# Altium PCB EM_Power_V2.PcbDoc (part 2 of 3)
Units mm, origin at the board's own origin, x right, y up, seen from the top; angles counter-clockwise.
Board outline 82 x 56 mm, 2 copper layers (Top Layer, Bottom Layer); 82 components, 61 nets, 273 pads, 201 vias.
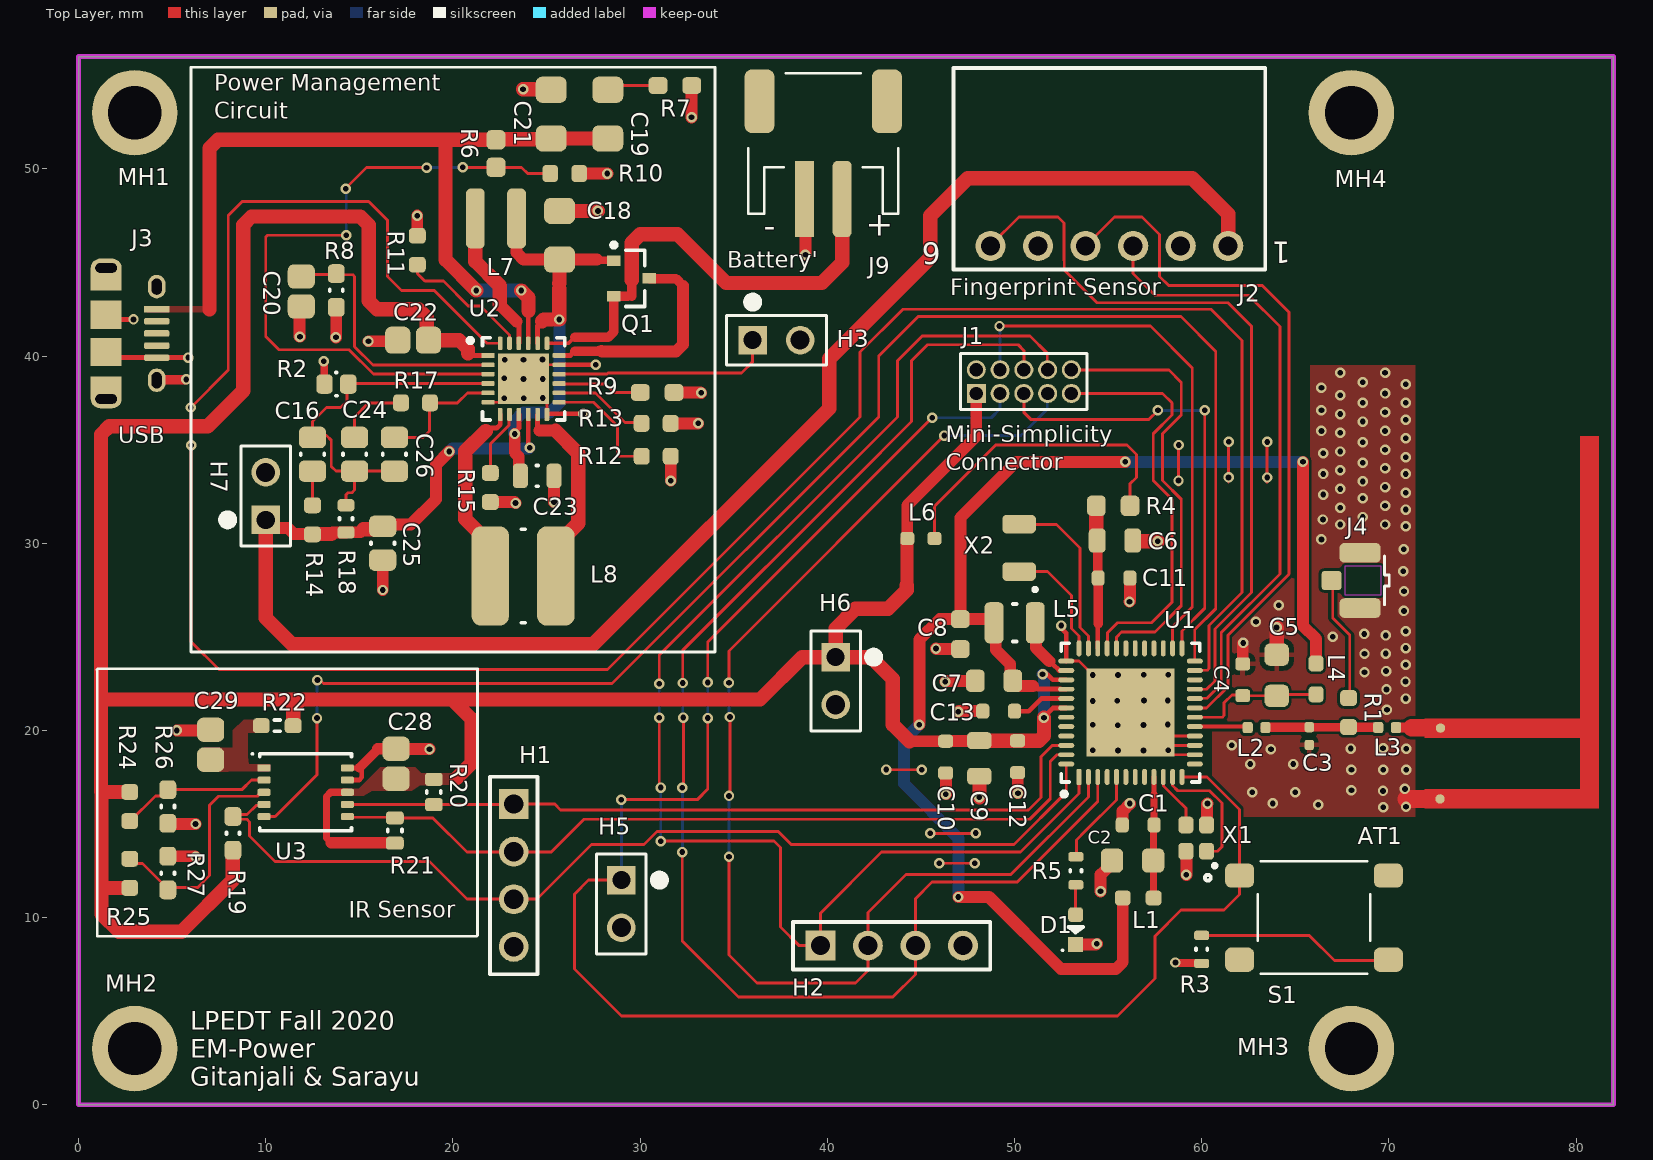
[diagram p0: Top Layer view]

## Part data (continued)
D1: library part L1CU-RED1000000000, "LED LUXEON CZ RED SMD", Case Code (Imperial)=0603, Case Code (Metric)=1608, Color=Green, Forward Current=30mA, Forward Voltage=3.2V, Manufacturer="Wurth Electronics", Manufacturer Part Number=150060GS75000, Max Operating Temperature=85°C, Min Operating Temperature=-40°C, Package Quantity=4000, Supplier Part Number 1=1416-2040-1-ND, Test Current=20mA, Case/Package=0603, Category=LEDs, ComponentLink1Description=https://datasheet.ciiva.com/29562/150060gs75000-29562868.pdf?src-supplier=Digi-Key, ComponentLink1URL=https://datasheet.ciiva.com/29562/150060gs75000-29562868.pdf?src-supplier=Digi-Key, ComponentLink2Description=https://datasheet.ciiva.com/29279/759427-da-01-en-chipled-0603-w-kl-gruen-150060gs75000-29279201.pdf?src-supplier=Conrad, ComponentLink2URL=https://datasheet.ciiva.com/29279/759427-da-01-en-chipled-0603-w-kl-gruen-150060gs75000-29279201.pdf?src-supplier=Conrad, ComponentLink3Description=https://datasheet.ciiva.com/29562/150060gs75000-29562870.pdf?src-supplier=Digi-Key, ComponentLink3URL=https://datasheet.ciiva.com/29562/150060gs75000-29562870.pdf?src-supplier=Digi-Key, ComponentLink4Description=https://datasheet.ciiva.com/29562/150060gs75000-29562869.pdf?src-supplier=Digi-Key, ComponentLink4URL=https://datasheet.ciiva.com/29562/150060gs75000-29562869.pdf?src-supplier=Digi-Key, Dominant Wavelength=520nm, Height=0.7mm, Lead Free="Lead Free", Length=1.6mm, Lens Style=Clear,Rectangular, Luminous Intensity=430mcd, Mount="Surface Mount", Packaging="Tape and Reel", Pricing 1="1=0.14000, 50=0.13300, 100=0.11400, 500=0.09900 (USD)", REACH SVHC=Unknown, RoHS=Yes, Stock 1=94535, Supplier 1=Digi-Key, Viewing Angle=140°, Wavelength=520nm, Width=0.8mm
H1 H2: library part PRPC004SAAN-RC, "CONN HEADER VERT 4POS 2.54MM", Color=Black, Manufacturer=Sullins, Standard Package=1, Supplier Part Number 1=S1011EC-04-ND, Category="Connectors, Interconnects", ComponentLink1Description=https://media.digikey.com/PDF/Data%20Sheets/Sullins%20PDFs/xRxCzzzSxxN-RC_ST_11635-B.pdf?src-supplier=Digi-Key, ComponentLink1URL=https://media.digikey.com/PDF/Data%20Sheets/Sullins%20PDFs/xRxCzzzSxxN-RC_ST_11635-B.pdf?src-supplier=Digi-Key, Connector Type="Header, Unshrouded, Breakaway", Contact Finish=Gold, Contact Finish Thickness=Flash, Contact Mating Length="0.230\" (5.84mm)", Contact Type="Male Pin", Family="Rectangular Connectors - Headers, Male Pins", Fastening Type=-, Features=-, Manufacturer Part Number=PRPC004SAAN-RC, Mounting Type="Through Hole", Number of Positions=4, Number of Positions Loaded=All, Number of Rows=1, Online Catalog="0.100\" (2.54mm) Pitch Connector Headers", Other Names="S9510E-04  S9510E-04-ND", Packaging=Bulk, Pitch="0.100\" (2.54mm)", Pricing 1="1=0.15, 10=0.146, 25=0.1084, 50=0.0928, 100=0.0898, 250=0.0774, 500=0.0743 (USD)", Row Spacing=-, Series=-, Stock 1=6306, Supplier 1=Digi-Key, Termination=Solder
H3 H5 H6 H7: library part 77311-118-02LF, "Test point", Manufacturer="Amphenol ICC / FCI", Supplier Part Number 1=609-4434-ND, Category="Headers and Wire Housings", Manufacturer Part Number=77311-118-02LF, Pricing 1="1=0.19000, 10=0.18200, 100=0.12580, 500=0.10648, 1000=0.08712, 5000=0.07744, 10000=0.07018 (USD)", RoHS=No, Stock 1=29534, Supplier 1=Digi-Key
J1: "10-pin Mini Simplicity Connector, 1.27 mm, 10 Contacts, Header, FTSH Series, Through Hole, 2 Rows - Board-To-Board Connector, 1.27 mm, 10 Contacts, Header, FTSH Series, Through Hole, 2 Rows", Color=Black, Manufacturer=Samtec, Max Operating Temperature=125°C, Min Operating Temperature=-55°C, Package Quantity=1, Supplier Part Number 1=SAM8798-ND, Category="Headers and Wire Housings", ComponentLink1Description=https://datasheet.ciiva.com/739/ftsh-1xx-xx-xxx-d-xx-mkt-739003.pdf?src-supplier=Digi-Key, ComponentLink1URL=https://datasheet.ciiva.com/739/ftsh-1xx-xx-xxx-d-xx-mkt-739003.pdf?src-supplier=Digi-Key, Connector Type="Male Pin", Contact Material=Bronze, Contact Mating Length=0.12inch, Contact Plating=Gold, Depth=3.43mm, Gender=Male, Housing Color=Black, Housing Material=Polymer, Length=6.35mm, Manufacturer Part Number=FTSH-105-01-L-D-K, Mount="Through Hole", Number of Contacts=10, Number of Positions=10, Number of Rows=2, Orientation=Straight, Packaging=Rail/Tube, Pitch=1.27mm, Pricing 1="1=2.73000, 10=2.61600, 100=2.18000, 500=1.85300, 1000=1.58050, 5000=1.41700 (USD)", Radiation Hardening=No, RoHS=Yes, Row Spacing=0.05inch, Stock 1=2511, Supplier 1=Digi-Key, Termination=Solder
J2: "Conn Socket Strip SKT 6 POS 2.54mm Solder RA SMD Automotive Tube", Color=Black, Contact Resistance=10mR, Current Rating=6.9A, Manufacturer=Samtec, Manufacturer Part Number=SSM-106-L-SH, Max Operating Temperature=125°C, Max Voltage Rating (AC)=450V, Min Operating Temperature=-55°C, Supplier Part Number 1=S5442-ND, Category="Headers and Wire Housings", ComponentLink1Description=https://datasheet.ciiva.com/25617/0900766b81159465-25617416.pdf?src-supplier=RSComponents, ComponentLink1URL=https://datasheet.ciiva.com/25617/0900766b81159465-25617416.pdf?src-supplier=RSComponents, ComponentLink2Description=https://datasheet.ciiva.com/746/ssm-1xx-xxx-xx-xx-xx-x-xx-xx-mkt-746688.pdf?src-supplier=Digi-Key, ComponentLink2URL=https://datasheet.ciiva.com/746/ssm-1xx-xxx-xx-xx-xx-x-xx-xx-mkt-746688.pdf?src-supplier=Digi-Key, Connector Type=Receptacle,Socket, Contact Material=Bronze, Contact Plating=Gold, Depth=8.13mm, Gender=Receptacle, Housing Color=Black, Housing Material=Polymer, Lead Free="Lead Free", Length=15.24mm, Max Current Rating=6.9A, Number of Contacts=6, Number of Positions=6, Number of Rows=1, Orientation=Horizontal, Packaging=Rail/Tube, Pitch=2.54mm, Pricing 1="1=2.05000, 10=1.79000, 25=1.67000, 100=1.63000, 250=1.50000, 500=1.26000 (USD)", Radiation Hardening=No, REACH SVHC="No SVHC", RoHS=Yes, Stock 1=228, Supplier 1=Digi-Key, Termination=Solder, Voltage Rating=450V
J3: "10118194-0001LF micro-USB paste-in-pad", Color=Black, Current Rating="1.8 A", Flammability Rating="UL 94 V-0", Insulation Resistance="1000 MOhms", Manufacturer=FCI, Manufacturer Part Number=10118194-0001LF, Operating Temperature Range="- 55 C to + 85 C", Supplier Part Number 1=609-4618-1-ND, .Creator="Kailey Shara", .PCBchecked=KS, .SCHchecked=KS, Brand=FCI, Category="Connectors, Interconnects", ComponentLink1Description=http://portal.fciconnect.com/Comergent//fci/drawing/10118194.pdf, ComponentLink1URL=http://portal.fciconnect.com/Comergent//fci/drawing/10118194.pdf, Connector Type="USB - micro B", Contact Material="Copper Alloy", Contact Plating=Gold, Features="Shielded, Solder Retention", Gender=Receptacle, Ingress Protection=-, Minimum Order Quantity=1, Mounting Angle=Right, Mounting Type="Surface Mount, Right Angle, Horizontal", Number of Contacts=5, Packaging="Cut Tape (CT)", Pricing 1="1=0.46, 10=0.433, 25=0.3712, 50=0.3156, 100=0.3032, 250=0.27224, 500=0.25988 (USD)", Product="Micro USB Type B Connectors", Reeling=True, RoHS="RoHS Compliant", Specifications="USB 2.0", Standard="USB 2.0", Standard Pack Qty=1200, Stock 1=27978, Supplier 1=Digi-Key, Termination Style=SMD
J4: library part "U.FL connector U.FL-R-SMT(10)", "CONN UMC JACK STR 50 OHM SMD", Dielectric Material="Liquid Crystal Polymer (LCP)", Frequency - Max=6GHz, Housing Color=Silver, Manufacturer="Hirose Electric Co Ltd", Maximum Frequency="6 GHz", Operating Temperature="-40°C ~ 90°C", Operating Temperature Range="- 40 C to + 90 C", Supplier Part Number 1=H9161CT-ND, Voltage Rating=-, Body Finish=Silver, Body Material="Phosphor Bronze", Brand="Hirose Connector", Cable Group=-, Category="Connectors, Interconnects", Center Contact Material="Phosphor Bronze", Center Contact Plating=Gold, ComponentLink1Description=http://media.digikey.com/pdf/Data%20Sheets/Hirose%20PDFs/UFL%20Series.pdf, ComponentLink1URL=http://media.digikey.com/pdf/Data%20Sheets/Hirose%20PDFs/UFL%20Series.pdf, ComponentLink2Description=http://www.hirose.co.jp/cataloge_hp/ed_UFL_20141014.pdf, ComponentLink2URL=http://www.hirose.co.jp/cataloge_hp/ed_UFL_20141014.pdf, Connector Style=U.FL, Connector Type="Jack, Male Pin", Contact Material=Brass, Contact Plating=Gold, Contact Termination=Solder, Fastening Type=Snap-On, Features=-, Gender=Plug, Impedance="50 Ohm", Ingress Protection=-, Manufacturer Part Number=U.FL-R-SMT(10), Minimum Order Quantity=1, Mounting Type="Surface Mount", Orientation=Vertical, Packaging="Cut Tape (CT)", Pricing 1="1=1.33, 10=1.173, 25=1.104, 50=1.058, 100=1.012, 250=0.92004, 500=0.82804, 1000=0.7216 (USD)", Pricing 2="1=1.75, 10=1.40, 100=1.34, 250=1.22, 500=1.12, 1000=0.974, 2500=0.882, 5000=0.852, 10000=0.792 (AUD)", Product=Connectors, Product Category="Coaxial Connectors", Reeling=True, RoHS="RoHS Compliant", RoHS - Mouser=Y, Series=U.FL, Shield Termination=Solder, Standard Pack Qty=2500, Stock 1=132773, Stock 2=89108, Supplier 1=Digi-Key, Supplier 2=Mouser, Supplier Part Number 2=798-U.FL-R-SMT10, Termination Style=Solder, Tradename=U.FL
J9: library part S2B-PH-SM4-TB(LF)(SN), "JST PH Series, 2 Position, Side Entry, 2.00mm, Solder, Surface Mount, Natural", Manufacturer=JST, Supplier Part Number 1=455-1749-1-ND, ComponentLink1Description=http://datasheet.octopart.com/S2B-PH-SM4-TB%28LF%29%28SN%29-JST-datasheet-10411123.pdf?src-supplier=Future+Electronics, ComponentLink1URL=http://datasheet.octopart.com/S2B-PH-SM4-TB%28LF%29%28SN%29-JST-datasheet-10411123.pdf?src-supplier=Future+Electronics, ComponentLink2Description=http://datasheet.octopart.com/S2B-PH-SM4-TB%28LF%29%28SN%29-JST-datasheet-8324864.pdf?src-supplier=Future+Electronics, ComponentLink2URL=http://datasheet.octopart.com/S2B-PH-SM4-TB%28LF%29%28SN%29-JST-datasheet-8324864.pdf?src-supplier=Future+Electronics, ComponentLink3Description=http://datasheet.octopart.com/S2B-PH-SM4-TB%28LF%29%28SN%29-JST-datasheet-15068535.pdf?src-supplier=Newark, ComponentLink3URL=http://datasheet.octopart.com/S2B-PH-SM4-TB%28LF%29%28SN%29-JST-datasheet-15068535.pdf?src-supplier=Newark, ComponentLink4Description=http://datasheet.octopart.com/S2B-PH-SM4-TB%28LF%29%28SN%29-JST-datasheet-56537.pdf?src-supplier=Future+Electronics, ComponentLink4URL=http://datasheet.octopart.com/S2B-PH-SM4-TB%28LF%29%28SN%29-JST-datasheet-56537.pdf?src-supplier=Future+Electronics, ComponentLink5Description=http://datasheet.octopart.com/S2B-PH-SM4-TB%28LF%29%28SN%29-JST-datasheet-515537.pdf?src-supplier=Farnell, ComponentLink5URL=http://datasheet.octopart.com/S2B-PH-SM4-TB%28LF%29%28SN%29-JST-datasheet-515537.pdf?src-supplier=Farnell, ComponentLink6Description=http://datasheet.octopart.com/S2B-PH-SM4-TB%28LF%29%28SN%29-JST-datasheet-12510261.pdf?src-supplier=Future+Electronics, ComponentLink6URL=http://datasheet.octopart.com/S2B-PH-SM4-TB%28LF%29%28SN%29-JST-datasheet-12510261.pdf?src-supplier=Future+Electronics, Manufacturer Part Number=S2B-PH-SM4-TB(LF)(SN), Pricing 1="1=0.58000, 10=0.54700, 100=0.41940, 500=0.36470 (USD)", Stock 1=117838, Supplier 1=Digi-Key
L1 L4: library part BLM18AG601SN1D, "BLM18AG601SN1D - Ferrite Bead, 0603 / 1608, 600 ohm, 500 mA, Série BLM18A, 0.38 ohm, ± 25%", Case Code (Imperial)=0603, Case Code (Metric)=1608, Current Rating=500mA, DC Resistance (DCR)=380mR, Frequency=100MHz, Manufacturer=Murata, Max Operating Temperature=125°C, Min Operating Temperature=-55°C, Package Quantity=1, Supplier Part Number 1=490-1014-1-ND, Tolerance=25%, Case/Package=0603, Category=Inductors, ComponentLink1Description=https://datasheet.ciiva.com/19460/1844766-19460213.pdf?src-supplier=Jameco, ComponentLink1URL=https://datasheet.ciiva.com/19460/1844766-19460213.pdf?src-supplier=Jameco, ComponentLink2Description=https://datasheet.ciiva.com/29347/442309-da-01-en-chip-drossel-0603-600r-500ma-1-6x0-8mm-29347900.pdf?src-supplier=Conrad, ComponentLink2URL=https://datasheet.ciiva.com/29347/442309-da-01-en-chip-drossel-0603-600r-500ma-1-6x0-8mm-29347900.pdf?src-supplier=Conrad, ComponentLink3Description=https://datasheet.ciiva.com/41449/001172228-da-01-en-drossel-0603-600r-1-6x0-8mm-4000st-41449517.pdf?src-supplier=Conrad, ComponentLink3URL=https://datasheet.ciiva.com/41449/001172228-da-01-en-drossel-0603-600r-1-6x0-8mm-4000st-41449517.pdf?src-supplier=Conrad, ComponentLink4Description=https://datasheet.ciiva.com/1012/l0110s0100blm18a-1012017.pdf?src-supplier=Digi-Key, ComponentLink4URL=https://datasheet.ciiva.com/1012/l0110s0100blm18a-1012017.pdf?src-supplier=Digi-Key, ComponentLink5Description=https://datasheet.ciiva.com/1012/l0110s0100blm18a-1012018.pdf?src-supplier=Digi-Key, ComponentLink5URL=https://datasheet.ciiva.com/1012/l0110s0100blm18a-1012018.pdf?src-supplier=Digi-Key, ComponentLink6Description=https://datasheet.ciiva.com/1012/l0110s0100blm18a-1012019.pdf?src-supplier=Digi-Key, ComponentLink6URL=https://datasheet.ciiva.com/1012/l0110s0100blm18a-1012019.pdf?src-supplier=Digi-Key, ComponentLink7Description=https://datasheet.ciiva.com/1466/1756147-1466933.pdf?src-supplier=Element14, ComponentLink7URL=https://datasheet.ciiva.com/1466/1756147-1466933.pdf?src-supplier=Element14, ComponentLink8Description=https://datasheet.ciiva.com/1466/1756147-1466934.pdf?src-supplier=Element14, ComponentLink8URL=https://datasheet.ciiva.com/1466/1756147-1466934.pdf?src-supplier=Element14, ComponentLink9Description=https://datasheet.ciiva.com/16210/l0110s0100blm18a-16210006.pdf?src-supplier=Future+Electronics, ComponentLink9URL=https://datasheet.ciiva.com/16210/l0110s0100blm18a-16210006.pdf?src-supplier=Future+Electronics, ComponentLink10Description=https://datasheet.ciiva.com/3081/l0110s0100blm18a-3081613.pdf?src-supplier=Avnet, ComponentLink10URL=https://datasheet.ciiva.com/3081/l0110s0100blm18a-3081613.pdf?src-supplier=Avnet, Core Material=Ferrite, DC Current=500mA, Depth=0.8mm, Height=0.8mm, Impedance=600R, Lead Free="Lead Free", Length=1.6mm, Manufacturer Part Number=BLM18AG601SN1D, Material=Steel,Ferrite, Max Current Rating=500mA, Max DC Current=500mA, Military Standard=Not, Number of Circuits=1, Number of Lines=1, Number of Pins=2, Packaging="Tape and Reel", Pricing 1="1=0.10000, 10=0.07200, 25=0.06560, 50=0.05900, 100=0.04320, 250=0.03144, 500=0.02882, 1000=0.02489 (USD)", Radiation Hardening=No, REACH SVHC="No SVHC", RoHS=Yes, Shielding=Unshielded, Stock 1=294956, Supplier 1=Digi-Key, Termination=SMD/SMT, Test Frequency=100MHz, Weight=7.1E-05oz, Width=0.8mm
L2 L3: library part LQP15MN1N9W02D, "Inductor 1.9nH 500MHz 13Q-Factor 220mA 300mOhm DCR 0402 Paper T/R", Case Code (Imperial)=0402, Case Code (Metric)=1005, Current Rating=220mA, DC Resistance (DCR)=300mR, Inductance=1.9nH, Manufacturer=Murata, Max Operating Temperature=85°C, Min Operating Temperature=-40°C, Package Quantity=10000, Resistor Type="Thin Film", Self Resonant Frequency=6GHz, Supplier Part Number 1=490-11739-1-ND, Test Frequency=500MHz, Case/Package=0402, Category="Fixed Inductors", ComponentLink1Description=https://datasheet.ciiva.com/30490/0900766b81256025-30490364.pdf?src-supplier=RSComponents, ComponentLink1URL=https://datasheet.ciiva.com/30490/0900766b81256025-30490364.pdf?src-supplier=RSComponents, ComponentLink2Description=https://datasheet.ciiva.com/8507/l0075s0084lqp15m-8507198.pdf?src-supplier=Avnet, ComponentLink2URL=https://datasheet.ciiva.com/8507/l0075s0084lqp15m-8507198.pdf?src-supplier=Avnet, Core Material=Ferrite, Depth=0.6mm, Height=0.35mm, Height - Seated (Max)=0.018inch, Length=1mm, Manufacturer Part Number=LQP15MN1N9W02D, Max DC Current=220mA, Mount="Surface Mount", Packaging="Tape and Reel", Pricing 1="1=0.19000, 10=0.17100, 25=0.15240, 50=0.12960, 100=0.11430, 250=0.10476, 500=0.09526, 1000=0.08001, 2500=0.06858 (USD)", Q Factor=13, Radiation Hardening=No, REACH SVHC="No SVHC", Resistance=300mR, RoHS=Yes, Shielding=Unshielded, Stock 1=38797, Supplier 1=Digi-Key, Termination=SMD/SMT, Width=0.5mm
L5: library part 74479787247, "4.7uH, 1.25 A, 1008 [2520 Metric] WURTH ELEKTRONIK         74479787247             Surface Mount High Frequency Inductor, WE-PMI Series,", Case Code (Imperial)=1008, Case Code (Metric)=2516, Case/Package=SMD/SMT, DC Resistance (DCR)=110mR, Inductance=4.7uH, Inductance Tolerance=20%, Manufacturer="Wurth Electronics", Max DC Current=1.25A, Max Operating Temperature=125°C, Min Operating Temperature=-40°C, Package Quantity=3000, Self Resonant Frequency=40MHz, Supplier Part Number 1=732-14079-1-ND, Test Frequency=1MHz, Category="Fixed Inductors", ComponentLink1Description=https://datasheet.ciiva.com/7354/1599851-7354771.pdf?src-supplier=Newark, ComponentLink1URL=https://datasheet.ciiva.com/7354/1599851-7354771.pdf?src-supplier=Newark, ComponentLink2Description=https://datasheet.ciiva.com/24213/74479787247-253805-24213913.pdf?src-supplier=Mouser, ComponentLink2URL=https://datasheet.ciiva.com/24213/74479787247-253805-24213913.pdf?src-supplier=Mouser, ComponentLink3Description=https://datasheet.ciiva.com/7754/1599851-7754726.pdf?src-supplier=Element14, ComponentLink3URL=https://datasheet.ciiva.com/7754/1599851-7754726.pdf?src-supplier=Element14, Core Material=Ferrite, Height=1mm, Length=2.5mm, Manufacturer Part Number=74479787247, Packaging="Cut Tape", Pricing 1="1=1.10000, 10=1.07000, 50=0.96600, 100=0.93200, 500=0.86300, 1000=0.79400 (USD)", Q Factor=20, REACH SVHC=Unknown, RoHS=Yes, Shielding=Shielded, Stock 1=2270, Supplier 1=Digi-Key, Termination=SMD/SMT, Weight=0.001129oz, Width=2mm
L6: library part 74279266, "Ferrite Bead, 0603 [1608 Metric], 1 kohm, 200 mA, WE-CBF Series, 0.6 ohm, ± 25%", Case Code (Imperial)=0603, Case Code (Metric)=1608, Case/Package=SMD/SMT, Current Rating=200mA, DC Resistance (DCR)=600mR, Inductance=1.8nH, Manufacturer="Wurth Electronics", Max Operating Temperature=125°C, Min Operating Temperature=-55°C, Supplier Part Number 1=732-4484-1-ND, Test Frequency=100MHz, Tolerance=25%, Category="Ferrite Beads and Chips", ComponentLink1Description=https://datasheet.ciiva.com/14634/0900766b801ef1d0-14634816.pdf?src-supplier=Allied+Electronics, ComponentLink1URL=https://datasheet.ciiva.com/14634/0900766b801ef1d0-14634816.pdf?src-supplier=Allied+Electronics, ComponentLink2Description=https://datasheet.ciiva.com/23763/74279266-23763009.pdf?src-supplier=Newark, ComponentLink2URL=https://datasheet.ciiva.com/23763/74279266-23763009.pdf?src-supplier=Newark, ComponentLink3Description=https://datasheet.ciiva.com/11799/0900766b801ef1d0-11799352.pdf?src-supplier=RSComponents, ComponentLink3URL=https://datasheet.ciiva.com/11799/0900766b801ef1d0-11799352.pdf?src-supplier=RSComponents, ComponentLink4Description=https://datasheet.ciiva.com/14971/74279266-14971192.pdf?src-supplier=Digi-Key, ComponentLink4URL=https://datasheet.ciiva.com/14971/74279266-14971192.pdf?src-supplier=Digi-Key, ComponentLink5Description=https://datasheet.ciiva.com/12395/74279266-221135-12395453.pdf?src-supplier=Mouser, ComponentLink5URL=https://datasheet.ciiva.com/12395/74279266-221135-12395453.pdf?src-supplier=Mouser, ComponentLink6Description=https://datasheet.ciiva.com/1466/1705901-1466509.pdf?src-supplier=Element14, ComponentLink6URL=https://datasheet.ciiva.com/1466/1705901-1466509.pdf?src-supplier=Element14, ComponentLink7Description=https://datasheet.ciiva.com/22711/1705901-22711422.pdf?src-supplier=Element14, ComponentLink7URL=https://datasheet.ciiva.com/22711/1705901-22711422.pdf?src-supplier=Element14, ComponentLink8Description=https://datasheet.ciiva.com/48698/001087059-da-01-ml-we-cbf-smd-ferrit-74279266-de-en-48698427.pdf?src-supplier=Conrad, ComponentLink8URL=https://datasheet.ciiva.com/48698/001087059-da-01-ml-we-cbf-smd-ferrit-74279266-de-en-48698427.pdf?src-supplier=Conrad, Core Material=Ferrite, Depth=0.8mm, Height=0.8mm, Impedance=1kR, Lead Free="Lead Free", Length=1.6mm, Manufacturer Part Number=74279266, Max DC Current=200mA, Packaging="Tape and Reel", Pricing 1="1=0.17000, 50=0.16800, 100=0.15500, 500=0.14800, 1000=0.14100, 2000=0.13400 (USD)", REACH SVHC=Unknown, RoHS=Yes, Shielding=Unshielded, Stock 1=123904, Supplier 1=Digi-Key, Termination=SMD/SMT, Width=0.8mm
L7: library part 744025003, "WURTH ELEKTRONIK - 744025003 - Leistungsinduktivität (SMD), 3.3 µH, 1.5 A, Geschirmt, 1.8 A, Baureihe WE-TPC", Case/Package=Nonstandard, Current Rating=1.5A, DC Resistance (DCR)=101mR, Inductance=3.3uH, Inductance Tolerance=20%, Manufacturer="Wurth Electronics", Max Operating Temperature=125°C, Min Operating Temperature=-40°C, Package Quantity=1, Resistor Type=Wirewound, Saturation Current=1.8A, Self Resonant Frequency=100MHz, Series Resistance=85MR, Supplier Part Number 1=732-2614-1-ND, Test Frequency=100kHz, Category="Fixed Inductors", ComponentLink1Description=https://datasheet.ciiva.com/11803/0900766b80f886b5-11803594.pdf?src-supplier=RSComponents, ComponentLink1URL=https://datasheet.ciiva.com/11803/0900766b80f886b5-11803594.pdf?src-supplier=RSComponents, ComponentLink2Description=https://datasheet.ciiva.com/1060/744025003-1060566.pdf?src-supplier=Digi-Key, ComponentLink2URL=https://datasheet.ciiva.com/1060/744025003-1060566.pdf?src-supplier=Digi-Key, ComponentLink3Description=https://datasheet.ciiva.com/4954/744025003-88791-4954796.pdf?src-supplier=Mouser, ComponentLink3URL=https://datasheet.ciiva.com/4954/744025003-88791-4954796.pdf?src-supplier=Mouser, ComponentLink4Description=https://datasheet.ciiva.com/14123/744025003-eng-tds-14123829.pdf?src-supplier=Distrelec, ComponentLink4URL=https://datasheet.ciiva.com/14123/744025003-eng-tds-14123829.pdf?src-supplier=Distrelec, ComponentLink5Description=https://datasheet.ciiva.com/1060/744025003-1060567.pdf?src-supplier=Digi-Key, ComponentLink5URL=https://datasheet.ciiva.com/1060/744025003-1060567.pdf?src-supplier=Digi-Key, ComponentLink6Description=https://datasheet.ciiva.com/1060/744025003-1060568.pdf?src-supplier=Digi-Key, ComponentLink6URL=https://datasheet.ciiva.com/1060/744025003-1060568.pdf?src-supplier=Digi-Key, Core Material=Ferrite, Depth=2.8mm, Height=2.8mm, Height - Seated (Max)=0.118inch, Length=2.8mm, Manufacturer Part Number=744025003, Max DC Current=1.5A, Mount="Surface Mount", Number of Pins=2, Packaging="Cut Tape", Pricing 1="1=1.54000, 10=1.48000, 50=1.36000, 100=1.13000, 250=1.02000 (USD)", REACH SVHC=Unknown, RMS Current (Irms)=1.5A, RoHS=Yes, Shielding=Shielded, Stock 1=2583, Supplier 1=Digi-Key, Termination=SMD/SMT, Tolerance=20%, Width=0.11inch
L8: library part 7440430022, "WURTH ELEKTRONIK - 7440430022 - Power Inductor (SMD), 2.2 µH, 2.5 A, Shielded, 2.35 A, WE-TPC Series, 4.8mm x 4.8mm x 2.8mm", Case Code (Imperial)=1919, Case Code (Metric)=4848, Current Rating=2.5A, DC Resistance (DCR)=28mR, Inductance=2.2uH, Inductance Tolerance=30%, Manufacturer="Wurth Electronics", Max Operating Temperature=125°C, Min Operating Temperature=-40°C, Package Quantity=500, Resistor Type=Wirewound, Saturation Current=2.35A, Self Resonant Frequency=100MHz, Supplier Part Number 1=732-1095-1-ND, Test Frequency=100kHz, Case/Package=1919, Category="Fixed Inductors", ComponentLink1Description=https://datasheet.ciiva.com/1075/7440430022-1075984.pdf?src-supplier=Digi-Key, ComponentLink1URL=https://datasheet.ciiva.com/1075/7440430022-1075984.pdf?src-supplier=Digi-Key, ComponentLink2Description=https://datasheet.ciiva.com/23782/1645803-23782392.pdf?src-supplier=Newark, ComponentLink2URL=https://datasheet.ciiva.com/23782/1645803-23782392.pdf?src-supplier=Newark, ComponentLink3Description=https://datasheet.ciiva.com/11803/0900766b80febc3e-11803289.pdf?src-supplier=RSComponents, ComponentLink3URL=https://datasheet.ciiva.com/11803/0900766b80febc3e-11803289.pdf?src-supplier=RSComponents, ComponentLink4Description=https://datasheet.ciiva.com/7754/1735426-7754427.pdf?src-supplier=Element14, ComponentLink4URL=https://datasheet.ciiva.com/7754/1735426-7754427.pdf?src-supplier=Element14, ComponentLink5Description=https://datasheet.ciiva.com/13277/7440430022-66848-13277005.pdf?src-supplier=Mouser, ComponentLink5URL=https://datasheet.ciiva.com/13277/7440430022-66848-13277005.pdf?src-supplier=Mouser, ComponentLink6Description=https://datasheet.ciiva.com/1075/7440430022-1075985.pdf?src-supplier=Digi-Key, ComponentLink6URL=https://datasheet.ciiva.com/1075/7440430022-1075985.pdf?src-supplier=Digi-Key, ComponentLink7Description=https://datasheet.ciiva.com/1075/7440430022-1075986.pdf?src-supplier=Digi-Key, ComponentLink7URL=https://datasheet.ciiva.com/1075/7440430022-1075986.pdf?src-supplier=Digi-Key, ComponentLink8Description=https://datasheet.ciiva.com/48690/001087187-da-01-ml-we-tpc-smd-speicherdrossel-7440430-de-en-48690886.pdf?src-supplier=Conrad, ComponentLink8URL=https://datasheet.ciiva.com/48690/001087187-da-01-ml-we-tpc-smd-speicherdrossel-7440430-de-en-48690886.pdf?src-supplier=Conrad, Core Material=Ferrite, Depth=4.8mm, Height=2.8mm, Height - Seated (Max)=0.118inch, Lead Free="Lead Free", Length=4.8mm, Manufacturer Part Number=7440430022, Max DC Current=2.5A, Mount="Surface Mount", Packaging="Tape and Reel", Pricing 1="1=1.43000, 10=1.38900, 50=1.31900, 100=1.21500, 250=1.14600 (USD)", REACH SVHC=Unknown, RMS Current (Irms)=2.5A, RoHS=Yes, Series Resistance=28mR, Shielding=Shielded, Stock 1=4983, Supplier 1=Digi-Key, Termination=SMD/SMT, Tolerance=30%, Weight=0.009065oz, Width=4.8mm
MH1 MH2 MH3 MH4: library part HOLE_#4
Q1: "Mosfet; Power; P-ch; Vdss -12V; Rds(on) 0.025 Ohm; Id -4.1A; TO-236 (SOT-23); Pd 0.75W", Case/Package=TO-236, Continuous Drain Current (ID)=4.1A, Drain to Source Breakdown Voltage=-12V, Drain to Source Resistance=32mR, Gate to Source Voltage (Vgs)=8V, Input Capacitance=1.1nF, Manufacturer="Vishay Siliconix", Max Operating Temperature=150°C, Max Power Dissipation=750mW, Min Operating Temperature=-55°C, Package Quantity=3000, Supplier Part Number 1=SI2333DS-T1-E3CT-ND, Threshold Voltage=-1V, Category=MOSFETs, ComponentLink1Description=https://datasheet.ciiva.com/5769/72023-5769120.pdf?src-supplier=Farnell, ComponentLink1URL=https://datasheet.ciiva.com/5769/72023-5769120.pdf?src-supplier=Farnell, ComponentLink2Description=https://datasheet.ciiva.com/4440/72023-244672-4440663.pdf?src-supplier=Mouser, ComponentLink2URL=https://datasheet.ciiva.com/4440/72023-244672-4440663.pdf?src-supplier=Mouser, ComponentLink3Description=https://datasheet.ciiva.com/26790/si2333ds-t1-e3-26790627.pdf?src-supplier=IIIC, ComponentLink3URL=https://datasheet.ciiva.com/26790/si2333ds-t1-e3-26790627.pdf?src-supplier=IIIC, ComponentLink4Description=https://datasheet.ciiva.com/26137/72023-26137974.pdf?src-supplier=Avnet+Europe, ComponentLink4URL=https://datasheet.ciiva.com/26137/72023-26137974.pdf?src-supplier=Avnet+Europe, ComponentLink5Description=https://datasheet.ciiva.com/932/72023-932280.pdf?src-supplier=Digi-Key, ComponentLink5URL=https://datasheet.ciiva.com/932/72023-932280.pdf?src-supplier=Digi-Key, ComponentLink6Description=https://datasheet.ciiva.com/932/72023-932282.pdf?src-supplier=Digi-Key, ComponentLink6URL=https://datasheet.ciiva.com/932/72023-932282.pdf?src-supplier=Digi-Key, ComponentLink7Description=https://datasheet.ciiva.com/11161/72023-11161502.pdf?src-supplier=Avnet, ComponentLink7URL=https://datasheet.ciiva.com/11161/72023-11161502.pdf?src-supplier=Avnet, ComponentLink8Description=https://datasheet.ciiva.com/932/72023-932281.pdf?src-supplier=Digi-Key, ComponentLink8URL=https://datasheet.ciiva.com/932/72023-932281.pdf?src-supplier=Digi-Key, ComponentLink9Description=https://datasheet.ciiva.com/16338/72023-16338653.pdf?src-supplier=Future+Electronics, ComponentLink9URL=https://datasheet.ciiva.com/16338/72023-16338653.pdf?src-supplier=Future+Electronics, Drain to Source Voltage (Vdss)=-12V, Element Configuration=Single, Fall Time=45ns, Height=1.02mm, Lead Free="Lead Free", Length=3.04mm, Manufacturer Part Number=SI2333DS-T1-E3, Mount="Surface Mount", Nominal Vgs=-1V, Number of Channels=1, Number of Elements=1, Number of Pins=3, On-State Resistance=32mR, Packaging="Tape and Reel", Power Dissipation=750mW, Pricing 1="1=0.65000, 10=0.56800, 25=0.53400, 100=0.38750, 500=0.32374, 1000=0.27552 (USD)", Radiation Hardening=No, Rds On Max=32mR, REACH SVHC=Unknown, Rise Time=45ns, RoHS=Yes, Stock 1=170951, Supplier 1=Digi-Key, Turn-Off Delay Time=72ns, Turn-On Delay Time=25ns, Weight=0.050717oz, Width=1.4mm
R1 R10 R11 R12 R13 R14 R15 R17 R24 R25: library part RC0603JR-070RL, "Jumper, 0 ohm, 0603 [Metrisch 1608], Baureihe RC, 75 V, Dickschicht", Case Code (Imperial)=0603, Case Code (Metric)=1608, Manufacturer=Yageo, Max Operating Temperature=155°C, Min Operating Temperature=-55°C, Package Quantity=5000, Power Rating=100mW, Resistance=0mR, Resistor Type="Thick Film", Supplier Part Number 1=311-0.0GRCT-ND, Temperature Coefficient=200ppm/°C, Tolerance=1%, Voltage Rating=50V, Case/Package=0603, Category="Chip SMD Resistors", ComponentLink1Description=https://datasheet.ciiva.com/11808/pyu-r-int-6-11808700.pdf?src-supplier=RSComponents, ComponentLink1URL=https://datasheet.ciiva.com/11808/pyu-r-int-6-11808700.pdf?src-supplier=RSComponents, ComponentLink2Description=https://datasheet.ciiva.com/7746/1738695-7746421.pdf?src-supplier=Element14, ComponentLink2URL=https://datasheet.ciiva.com/7746/1738695-7746421.pdf?src-supplier=Element14, ComponentLink3Description=https://datasheet.ciiva.com/8883/pyu-rc0603-51-rohs-l-4-8883045.pdf?src-supplier=Avnet, ComponentLink3URL=https://datasheet.ciiva.com/8883/pyu-rc0603-51-rohs-l-4-8883045.pdf?src-supplier=Avnet, ComponentLink4Description=https://datasheet.ciiva.com/15189/getdatasheetpartid-329462-15189845.pdf?src-supplier=Verical, ComponentLink4URL=https://datasheet.ciiva.com/15189/getdatasheetpartid-329462-15189845.pdf?src-supplier=Verical, ComponentLink5Description=https://datasheet.ciiva.com/7746/1738695-7746422.pdf?src-supplier=Element14, ComponentLink5URL=https://datasheet.ciiva.com/7746/1738695-7746422.pdf?src-supplier=Element14, ComponentLink6Description=https://datasheet.ciiva.com/12555/rc0603-272842-12555254.pdf?src-supplier=Mouser, ComponentLink6URL=https://datasheet.ciiva.com/12555/rc0603-272842-12555254.pdf?src-supplier=Mouser, ComponentLink7Description=https://datasheet.ciiva.com/22747/443971-22747530.pdf?src-supplier=Element14, ComponentLink7URL=https://datasheet.ciiva.com/22747/443971-22747530.pdf?src-supplier=Element14, Contact Plating=Tin,Matte, Depth=0.8mm, Height=0.45mm, Lead Free="Lead Free", Length=1.6mm, Manufacturer Part Number=RC0603JR-070RL, Military Standard=Not, Number of Pins=2, Packaging="Tape and Reel", Pricing 1="1=0.10000, 10=0.01700, 25=0.01240, 50=0.00960, 100=0.00700, 250=0.00536, 500=0.00428, 1000=0.00315 (USD)", Radiation Hardening=No, REACH SVHC="No SVHC", RoHS=Yes, Stock 1=12794789, Supplier 1=Digi-Key, Termination=SMD/SMT, Voltage Rating (DC)=50V, Width=0.8mm
R2: library part CRCW06031K00FKEAC, "Res Thick Film 0603 1K Ohm 1% 1/10W ±100ppm/°C Molded SMD SMD T/R", Case Code (Imperial)=0603, Case Code (Metric)=1608, Manufacturer=Vishay, Manufacturer Part Number=CHPHT0603K1001FGT, Max Operating Temperature=230°C, Max Power Dissipation=12.5mW, Min Operating Temperature=-55°C, Package Quantity=100, Resistance=1kR, Resistor Type="Thick Film", Supplier Part Number 1=541-1.00KHCT-ND, Temperature Coefficient=100ppm/°C, Tolerance=1%, Voltage Rating=50V, Case/Package=0603, Category="Chip SMD Resistors", ComponentLink1Description=https://datasheet.ciiva.com/16778/70234125-16778296.pdf?src-supplier=Allied+Electronics, ComponentLink1URL=https://datasheet.ciiva.com/16778/70234125-16778296.pdf?src-supplier=Allied+Electronics, ComponentLink2Description=https://datasheet.ciiva.com/2627/chpht-2627389.pdf?src-supplier=Digi-Key, ComponentLink2URL=https://datasheet.ciiva.com/2627/chpht-2627389.pdf?src-supplier=Digi-Key, ComponentLink3Description=https://datasheet.ciiva.com/2627/chpht-2627390.pdf?src-supplier=Digi-Key, ComponentLink3URL=https://datasheet.ciiva.com/2627/chpht-2627390.pdf?src-supplier=Digi-Key, ComponentLink4Description=https://datasheet.ciiva.com/2627/chpht-2627391.pdf?src-supplier=Digi-Key, ComponentLink4URL=https://datasheet.ciiva.com/2627/chpht-2627391.pdf?src-supplier=Digi-Key, Contact Plating=Gold, Features="Moisture Resistant", Height=0.02inch, Length=0.063inch, Number of Terminations=2, Packaging="Tape and Reel", Power Rating=12.5mW, Pricing 1="100=6.69440 (USD)", Radiation Hardening=No, RoHS=Yes, Stock 1=100, Supplier 1=Digi-Key, Termination=SMD/SMT, Width=0.9mm
R3 R5: library part SDR03EZPF3301, "RES SMD 3.3 KOHM 1% 0.3W 0603", Case Code (Imperial)=0201, Case Code (Metric)=0603, Manufacturer=Yageo, Manufacturer Part Number=RC0201FR-07100RL, Max Operating Temperature=125°C, Max Power Dissipation=50mW, Min Operating Temperature=-55°C, Package Quantity=1, Resistance=100R, Resistor Type="Thick Film", Supplier Part Number 1=511-1715-1-ND, Temperature Coefficient=200ppm/°C, Tolerance=1%, Voltage Rating=25V, Case/Package=0201, Category="Chip SMD Resistors", ComponentLink1Description=https://datasheet.ciiva.com/2560/pyu-r-int-thick-7-2560866.pdf?src-supplier=Digi-Key, ComponentLink1URL=https://datasheet.ciiva.com/2560/pyu-r-int-thick-7-2560866.pdf?src-supplier=Digi-Key, ComponentLink2Description=https://datasheet.ciiva.com/28395/pyu-rc0201-51-rohs-l-8-28395391.pdf?src-supplier=Avnet+Europe, ComponentLink2URL=https://datasheet.ciiva.com/28395/pyu-rc0201-51-rohs-l-8-28395391.pdf?src-supplier=Avnet+Europe, ComponentLink3Description=https://datasheet.ciiva.com/2560/pyu-r-int-thick-7-2560865.pdf?src-supplier=Digi-Key, ComponentLink3URL=https://datasheet.ciiva.com/2560/pyu-r-int-thick-7-2560865.pdf?src-supplier=Digi-Key, ComponentLink4Description=https://datasheet.ciiva.com/2560/pyu-r-int-thick-7-2560867.pdf?src-supplier=Digi-Key, ComponentLink4URL=https://datasheet.ciiva.com/2560/pyu-r-int-thick-7-2560867.pdf?src-supplier=Digi-Key, ComponentLink5Description=https://datasheet.ciiva.com/16855/pyu-rc0201-51-rohs-l-8-16855781.pdf?src-supplier=Avnet+Europe, ComponentLink5URL=https://datasheet.ciiva.com/16855/pyu-rc0201-51-rohs-l-8-16855781.pdf?src-supplier=Avnet+Europe, ComponentLink6Description=https://datasheet.ciiva.com/8887/pyu-rc0201-51-rohs-l-8-8887865.pdf?src-supplier=Avnet, ComponentLink6URL=https://datasheet.ciiva.com/8887/pyu-rc0201-51-rohs-l-8-8887865.pdf?src-supplier=Avnet, Contact Plating=Tin,Matte, Features="Moisture Resistant", Height=0.01inch, Lead Free="Lead Free", Length=0.024inch, Number of Terminations=2, Packaging="Tape and Reel", Power Rating=50mW, Pricing 1="1=0.10000, 10=0.03700, 100=0.01500, 1000=0.00673, 2500=0.00584, 5000=0.00483 (USD)", Radiation Hardening=No, REACH SVHC=Unknown, RoHS=Yes, Stock 1=274418, Supplier 1=Digi-Key, Termination=SMD/SMT, Width=0.012inch
R4: library part KTR03EZPF1R00, "RES SMD 1 OHM 1% 1/10W 0603", Case Code (Imperial)=0402, Case Code (Metric)=1005, Manufacturer=Vishay, Manufacturer Part Number=CRCW04021R00FNED, Max Operating Temperature=155°C, Max Power Dissipation=63mW, Min Operating Temperature=-55°C, Package Quantity=10000, Resistance=1R, Resistor Type="Thick Film", Supplier Part Number 1=RHM1.00AYCT-ND, Temperature Coefficient=200ppm/°C, Tolerance=1%, Voltage Rating=50V, Case/Package=0402, Category="Chip SMD Resistors", ComponentLink1Description=https://datasheet.ciiva.com/6027/1697337-6027861.pdf?src-supplier=Farnell, ComponentLink1URL=https://datasheet.ciiva.com/6027/1697337-6027861.pdf?src-supplier=Farnell, ComponentLink2Description=https://datasheet.ciiva.com/2560/dcrcwe3-2560102.pdf?src-supplier=Digi-Key, ComponentLink2URL=https://datasheet.ciiva.com/2560/dcrcwe3-2560102.pdf?src-supplier=Digi-Key, ComponentLink3Description=https://datasheet.ciiva.com/3256/dcrcwe3-3256200.pdf?src-supplier=Avnet, ComponentLink3URL=https://datasheet.ciiva.com/3256/dcrcwe3-3256200.pdf?src-supplier=Avnet, ComponentLink4Description=https://datasheet.ciiva.com/5552/dcrcwe3-109170-5552232.pdf?src-supplier=Mouser, ComponentLink4URL=https://datasheet.ciiva.com/5552/dcrcwe3-109170-5552232.pdf?src-supplier=Mouser, ComponentLink5Description=https://datasheet.ciiva.com/16436/dcrcwe3-16436173.pdf?src-supplier=Future+Electronics, ComponentLink5URL=https://datasheet.ciiva.com/16436/dcrcwe3-16436173.pdf?src-supplier=Future+Electronics, ComponentLink6Description=https://datasheet.ciiva.com/7841/125364-7841807.pdf?src-supplier=Element14, ComponentLink6URL=https://datasheet.ciiva.com/7841/125364-7841807.pdf?src-supplier=Element14, ComponentLink7Description=https://datasheet.ciiva.com/2560/dcrcwe3-2560101.pdf?src-supplier=Digi-Key, ComponentLink7URL=https://datasheet.ciiva.com/2560/dcrcwe3-2560101.pdf?src-supplier=Digi-Key, ComponentLink8Description=https://datasheet.ciiva.com/2560/dcrcwe3-2560103.pdf?src-supplier=Digi-Key, ComponentLink8URL=https://datasheet.ciiva.com/2560/dcrcwe3-2560103.pdf?src-supplier=Digi-Key, ComponentLink9Description=https://datasheet.ciiva.com/3256/dcrcwe3-3256199.pdf?src-supplier=Avnet, ComponentLink9URL=https://datasheet.ciiva.com/3256/dcrcwe3-3256199.pdf?src-supplier=Avnet, Contact Plating=Tin, Depth=0.5mm, Features="Automotive AEC-Q200", Height=0.016inch, Lead Free="Lead Free", Length=1mm, Military Standard=Not, Mount="Surface Mount", Number of Pins=2, Number of Terminations=2, Packaging="Tape and Reel", Power Rating=63mW, Pricing 1="1=0.10000, 10=0.05000, 100=0.02040, 1000=0.00914, 2500=0.00794, 5000=0.00656 (USD)", Radiation Hardening=No, REACH SVHC=Unknown, RoHS=Yes, Stock 1=17185, Supplier 1=Digi-Key, Termination=SMD/SMT, Voltage Rating (DC)=50V, Weight=2.3E-05oz, Width=0.02inch
R6: library part RC0603FR-07100KL, "RES SMD 100K OHM 1% 1/10W 0603", Case Code - in=0603, Case Code - mm=1608, Manufacturer=Yageo, Operating Temperature Range="- 55 C to + 155 C", Power Rating="100 mW", Resistance="100 kOhms", Supplier Part Number 1=311-100KHRCT-ND, Temperature Coefficient="100 PPM / C", Tolerance="1 %", Voltage Rating="50 V", ComponentLink1Description=http://www.farnell.com/datasheets/2167052.pdf?src-supplier=Element14, ComponentLink1URL=http://www.farnell.com/datasheets/2167052.pdf?src-supplier=Element14, ComponentLink2Description=http://www.farnell.com/datasheets/1868787.pdf?src-supplier=Element14, ComponentLink2URL=http://www.farnell.com/datasheets/1868787.pdf?src-supplier=Element14, ComponentLink3Description=http://documents.rs-components.com/techlib://itc_doclist_GB.htm?stockno=5048940&src-supplier=RSComponents, ComponentLink3URL=http://documents.rs-components.com/techlib://itc_doclist_GB.htm?stockno=5048940&src-supplier=RSComponents, ComponentLink4Description=http://www.farnell.com/datasheets/443971.pdf?src-supplier=Element14, ComponentLink4URL=http://www.farnell.com/datasheets/443971.pdf?src-supplier=Element14, Manufacturer Part Number=RC0603FR-07100KL, Packaging=Reel, Pricing 1="1=0.1, 10=0.022, 100=0.009, 1000=0.0041, 2500=0.0035 (USD)", Product="Thick Film Resistors General Purpose", Series=RC, Stock 1=13478446, Supplier 1=Digi-Key, Termination Style=SMD/SMT
R7: library part RC0603FR-07100RL, "YAGEO         RC0603FR-07100RL            RES, THICK FILM, 100R, 1%, 0.1W, 0603, REEL", Case Code (Imperial)=0603, Case Code (Metric)=1608, Manufacturer=Yageo, Max Operating Temperature=155°C, Min Operating Temperature=-55°C, Power Rating=100mW, Resistance=100R, Resistor Type="Thick Film", Supplier Part Number 1=311-100HRCT-ND, Temperature Coefficient=100ppm/°C, Tolerance=1%, Voltage Rating=50V, Case/Package=0603, Category="Chip SMD Resistors", ComponentLink1Description=https://datasheet.ciiva.com/7660/38590-7660788.pdf?src-supplier=Element14, ComponentLink1URL=https://datasheet.ciiva.com/7660/38590-7660788.pdf?src-supplier=Element14, ComponentLink2Description=https://datasheet.ciiva.com/11808/0900766b80f96399-11808280.pdf?src-supplier=RSComponents, ComponentLink2URL=https://datasheet.ciiva.com/11808/0900766b80f96399-11808280.pdf?src-supplier=RSComponents, ComponentLink3Description=https://datasheet.ciiva.com/46440/1868787-46440890.pdf?src-supplier=Element14, ComponentLink3URL=https://datasheet.ciiva.com/46440/1868787-46440890.pdf?src-supplier=Element14, ComponentLink4Description=https://datasheet.ciiva.com/7746/1738695-7746237.pdf?src-supplier=Element14, ComponentLink4URL=https://datasheet.ciiva.com/7746/1738695-7746237.pdf?src-supplier=Element14, ComponentLink5Description=https://datasheet.ciiva.com/7746/1738695-7746238.pdf?src-supplier=Element14, ComponentLink5URL=https://datasheet.ciiva.com/7746/1738695-7746238.pdf?src-supplier=Element14, ComponentLink6Description=https://datasheet.ciiva.com/22747/443971-22747518.pdf?src-supplier=Element14, ComponentLink6URL=https://datasheet.ciiva.com/22747/443971-22747518.pdf?src-supplier=Element14, Depth=0.8mm, Height=0.45mm, Lead Free="Lead Free", Length=1.6mm, Manufacturer Part Number=RC0603FR-07100RL, Military Standard=Not, Number of Pins=2, Packaging="Tape and Reel", Pricing 1="1=0.10000, 10=0.02100, 100=0.00850, 1000=0.00382, 2500=0.00331 (USD)", REACH SVHC=Unknown, RoHS=Yes, Stock 1=5640043, Supplier 1=Digi-Key, Termination=SMD/SMT, Voltage Rating (DC)=50V, Width=0.8mm